# EAGLE board SO8_SO8W (EAGLE 6.4)
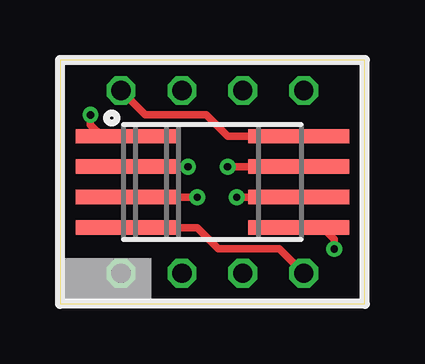
[diagram p0: board, top side]
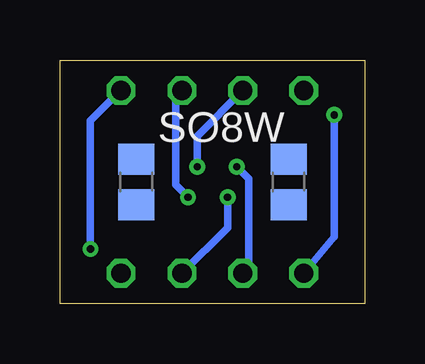
[diagram p1: board, bottom side, seen from below]

Size 12.7 x 10.16 mm. Coordinates in mm from the lower left corner, seen from the top.
Outline: 0,0 12.7,0 12.7,10.16 0,10.16 0,0
Copper layers (1*16): Top 0.0356mm / dielectric 1.5011mm / Bottom 0.0356mm
Design rules "oshpark": minimum track width 6mil, minimum drill 13mil, track to track 6mil, track to pad 6mil, pad to pad 6mil, via to via 6mil, smd to smd 6mil, copper to edge 15mil, drill to drill 6mil, minimum pad ring 7mil, minimum via ring 7mil, stop-mask expansion 4mil, vias tented up to drill 0mil, thermal gap 10mil

## Footprints (pad centres in the part's own frame; a part is rotated, then mirrored left to right if it is on the bottom)
C0805 = smd 1.3 x 1.5: 1 -0.95,0; 2 0.95,0
SO08W = smd 0.6 x 2.2: 1 -1.905,-4.6; 2 -0.635,-4.6; 3 0.635,-4.6; 4 1.905,-4.6; 5 1.905,4.6; 6 0.635,4.6; 7 -0.635,4.6; 8 -1.905,4.6
1 = drill 0.8 octagon: P$1 0,0
SO8 = smd 0.6 x 2.2: 1 -1.905,-2.6; 2 -0.635,-2.6; 3 0.635,-2.6; 4 1.905,-2.6; 5 1.905,2.6; 6 0.635,2.6; 7 -0.635,2.6; 8 -1.905,2.6

## Placement (x,y rotation side)
E$1  [C0805]  9.53,5.08 90 bottom
E$2  [C0805]  3.17,5.08 90 bottom
E$635  [SO08W]  6.35,5.08 270 top
E$636  [1]  2.54,8.89 0 top
E$637  [1]  5.08,8.89 0 top
E$638  [1]  7.62,8.89 0 top
E$639  [1]  10.16,8.89 0 top
E$640  [1]  2.54,1.27 0 top
E$641  [1]  5.08,1.27 0 top
E$642  [1]  7.62,1.27 0 top
E$643  [1]  10.16,1.27 0 top
E$644  [SO8]  6.35,5.08 270 top

## Library data of the parts
E$1 E$2 E$635 E$644 = ref-packages
E$636-E$643 = drill

## Nets
S$309: E$635.1 E$640.P$1 E$644.1
S$310: E$635.2 E$641.P$1 E$644.2
S$311: E$635.3 E$642.P$1 E$644.3
S$312: E$635.4 E$643.P$1 E$644.4
S$313: E$635.8 E$636.P$1 E$644.8
S$314: E$635.7 E$637.P$1 E$644.7
S$315: E$635.6 E$638.P$1 E$644.6
S$316: E$635.5 E$639.P$1 E$644.5

## Tracks (layer width: path | path; a pad name or v marks a point on that pad's centre or on a via)
S$309  (via drill 0.3)
  Top 0.305: v1.27,7.87 1.27,7.46 E$635.1 E$644.1
  Bottom 0.305: v1.27,7.87 1.27,2.79 E$640.P$1
S$310  (via drill 0.3)
  Top 0.305: v5.33,5.71 E$644.2 E$635.2
  Bottom 0.305: v5.33,5.71 4.83,5.21 4.83,1.52 E$641.P$1
S$311  (via drill 0.3)
  Top 0.305: E$635.3 E$644.3 v5.71,4.45
  Bottom 0.305: E$642.P$1 5.71,3.17 v5.71,4.45
S$312
  Top 0.305: E$635.4 E$644.4 5.71,3.17 6.6,2.29 9.14,2.29 E$643.P$1
S$313
  Top 0.305: E$644.8 E$635.8 6.99,6.99 6.1,7.87 3.56,7.87 E$636.P$1
S$314  (via drill 0.3)
  Top 0.305: E$635.7 E$644.7 v6.99,5.71
  Bottom 0.305: E$637.P$1 6.99,6.99 v6.99,5.71
S$315  (via drill 0.3)
  Top 0.305: E$635.6 E$644.6 v7.37,4.45
  Bottom 0.305: v7.37,4.45 7.87,4.95 7.87,8.64 E$638.P$1
S$316  (via drill 0.3)
  Top 0.305: E$644.5 E$635.5 11.43,2.69 v11.43,2.29
  Bottom 0.305: v11.43,2.29 11.43,7.62 E$639.P$1

## Text on the board
bPlace: SO8W